# EAGLE board grid-rfduino_v3 (EAGLE 6.5.0)
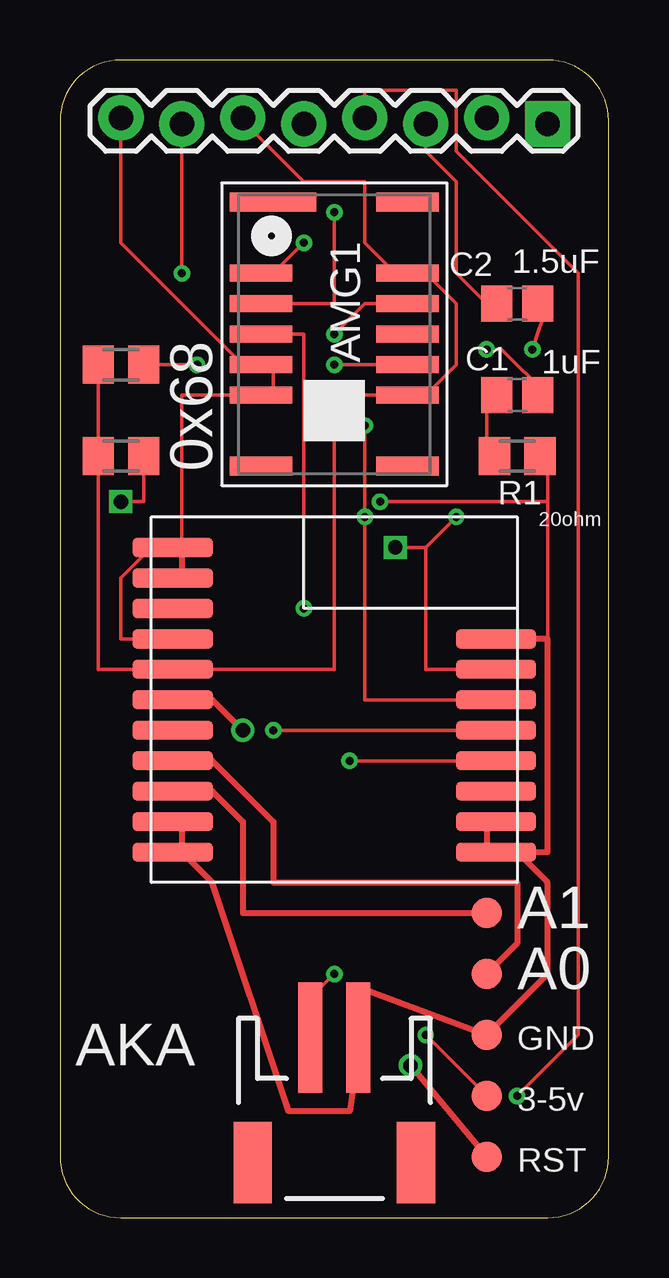
[diagram p0: board, top side]
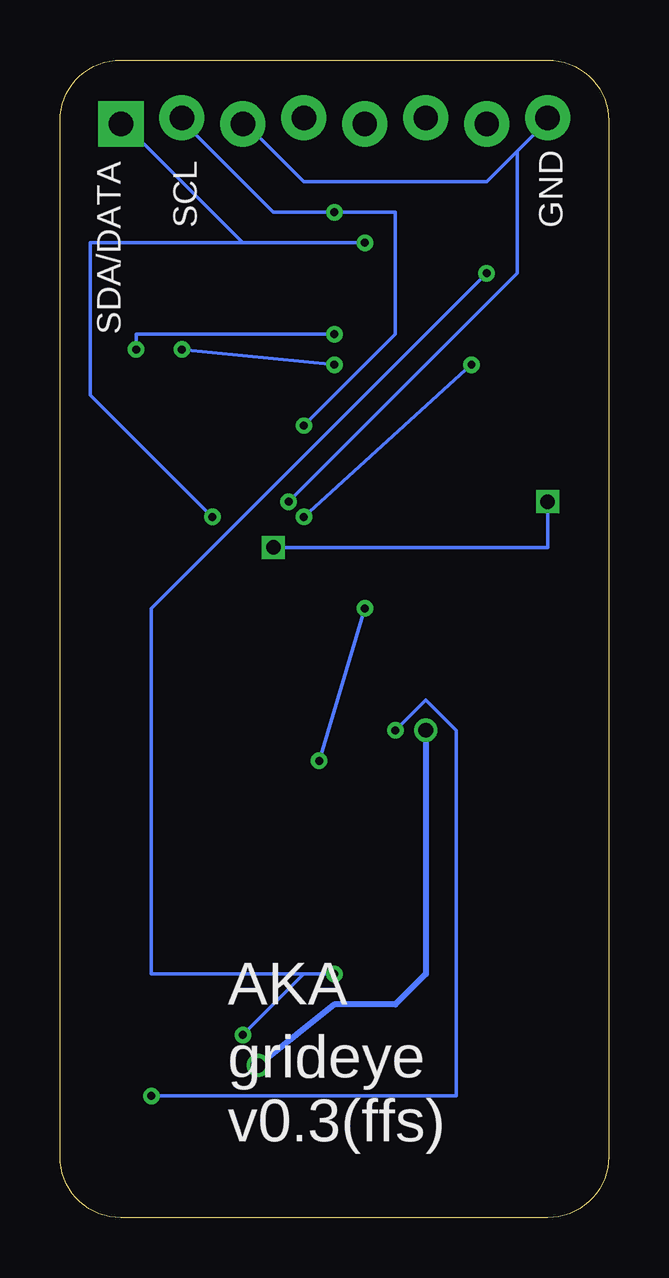
[diagram p1: board, bottom side, seen from below]

Size 22.86 x 48.26 mm. Coordinates in mm from the lower left corner, seen from the top.
Outline: 2.54,0 20.32,0 arc90 22.86,2.54 22.86,45.72 arc90 20.32,48.26 2.54,48.26 arc90 0,45.72 0,2.54 arc90 2.54,0
Copper layers (1*16): Top 0.0356mm / dielectric 1.5011mm / Bottom 0.0356mm
Design rules "LaenPCBOrder": minimum track width 6mil, minimum drill 13mil, track to track 6mil, track to pad 6mil, pad to pad 6mil, via to via 6mil, smd to smd 6mil, copper to edge 15mil, drill to drill 6mil, minimum pad ring 7mil, minimum via ring 7mil, stop-mask expansion 3mil, vias tented up to drill 0mil, thermal gap 10mil

## Footprints (pad centres in the part's own frame; a part is rotated, then mirrored left to right if it is on the bottom)
AMG8831 = smd 0.8 x 3.6: 1 -5.5,-2.55 | smd 0.7 x 2.6: 2 -2.54,-3.05; 3 -1.27,-3.05; 4 0,-3.05; 5 1.27,-3.05; 6 2.54,-3.05; 9 2.54,3.05; 10 1.27,3.05; 11 0,3.05; 12 -1.27,3.05; 13 -2.54,3.05 | smd 0.8 x 2.6: 7 5.5,-3.05; 8 5.5,3.05; 14 -5.5,3.05
C0805 = smd 1.3 x 1.5: 1 -0.85,0; 2 0.85,0
JST-2-SMD = smd 1 x 4.6: 1 -1,-3.7; 2 1,-3.7 | smd 1.6 x 3.4: NC1 -3.4,1.5; NC2 3.4,1.5
M0805 = smd 1.3 x 1.6: 1 -0.95,0; 2 0.95,0
1X08_LOCK = drill 1.016 pad 1.88 square: 1 0,0.127 | drill 1.016 pad 1.88: 2 2.54,-0.127; 3 5.08,0.127; 4 7.62,-0.127; 5 10.16,0.127; 6 12.7,-0.127; 7 15.24,0.127; 8 17.78,-0.127
PAD.03X.05 = smd 1.27 x 1.27: P$1 0,0
RFD21733 = smd 3.353 x 0.813: P$1 -6.731,6.35; P$2 -6.731,5.08; P$3 -6.731,3.81; P$4 -6.731,2.54; P$5 -6.731,1.27; P$6 -6.731,0; P$7 -6.731,-1.27; P$8 -6.731,-2.54; P$9 6.731,-6.35; P$10 6.731,-5.08; P$11 6.731,-3.81; P$12 6.731,-2.54; P$13 6.731,-1.27; P$14 6.731,0; P$15 6.731,1.27; P$16 6.731,2.54; P$17 6.731,3.81; P$18 6.731,5.08; P$19 6.731,6.35

## Placement (x,y rotation side)
AMG1  [AMG8831]  11.43,36.83 270 top
C1  1uF  [C0805]  19.05,34.29 180 top
C2  1.5uF  [C0805]  19.05,38.1 180 top
JP1  M02-JST-2MM-SMT  [JST-2-SMD]  11.43,3.81 180 top
R1  20ohm  [M0805]  19.05,31.75 180 top
R2  10k  [M0805]  2.54,35.56 0 top
R3  10k  [M0805]  2.54,31.75 0 top
TO_OLED  [1X08_LOCK]  20.32,45.72 180 top
TP1  TEST-POINT3X5  [PAD.03X.05]  17.78,10.16 0 top
TP2  TEST-POINT3X5  [PAD.03X.05]  17.78,12.7 0 top
TP3  TEST-POINT3X5  [PAD.03X.05]  17.78,5.08 0 top
TP4  TEST-POINT3X5  [PAD.03X.05]  17.78,7.62 0 top
TP5  TEST-POINT3X5  [PAD.03X.05]  17.78,2.54 0 top
U$1  RFD22301  [RFD21733]  11.43,21.59 180 top

## Library data of the parts
AMG1 = AKA_test
C1 C2 R1-R3 = adafruit
JP1 = SparkFun-Connectors; PROD_ID: CONN-08352
TO_OLED = SparkFun-Connectors
TP1-TP5 = SparkFun-Passives
U$1 = RFD22301-11.25.13

## Nets
3V3: AMG1.9 AMG1.13 R2.1 R3.1 TO_OLED.6 U$1.P$13
A0: TP1.P$1 U$1.P$16
A1: TP2.P$1 U$1.P$17
AVDD-PC: AMG1.10 C1.1
DVDD-PC: AMG1.12 C2.1
GND: AMG1.5 AMG1.6 C2.2 JP1.1 R1.1 TO_OLED.3 TO_OLED.8 TP4.P$1 U$1.P$1 U$1.P$2 U$1.P$8 U$1.P$9 U$1.P$10 U$1.P$12 U$1.P$18 U$1.P$19
INT: AMG1.4 U$1.P$4
N$1: C1.2 R1.2
OLED-RESET: TO_OLED.4 U$1.P$5
RFD-RESET: TP5.P$1 U$1.P$14
SCL: AMG1.3 R2.2 TO_OLED.2 U$1.P$6
SDA: AMG1.2 R3.2 TO_OLED.1 U$1.P$7
VIN: JP1.2 TO_OLED.7 TP3.P$1

## Tracks (layer width: path | path; a pad name or v marks a point on that pad's centre or on a via)
3V3
  Top 0.152: TO_OLED.6 7.62,45.72 10.16,43.18 12.7,43.18 12.7,40.64 13.97,39.37 AMG1.13 15.24,39.37 16.51,38.1 16.51,35.56 15.24,34.29 AMG1.9 12.7,34.29 11.43,33.02 11.43,22.86 U$1.P$13 1.59,22.86 R3.1 R2.1
A0
  Top 0.254: TP1.P$1 19.05,11.43 19.05,13.97 8.89,13.97 8.89,16.51 6.35,19.05 U$1.P$16
A1
  Top 0.254: TP2.P$1 7.62,12.7 7.62,16.51 6.35,17.78 U$1.P$17
AVDD-PC  (via drill 0.33)
  Top 0.152: v17.78,36.2 18.41,36.2 20.32,34.29 C1.1 | AMG1.10 v11.43,35.56
  Bottom 0.152: v11.43,35.56 v17.78,36.2
DVDD-PC  (via drill 0.33)
  Top 0.152: v19.68,36.2 20.32,38.1 C2.1 | v11.43,36.83 12.7,38.1 AMG1.12
  Bottom 0.152: v11.43,36.83 19.68,36.83 v19.68,36.2
GND  (via drill 0.33)
  Top 0.152: C2.2 17.78,38.1 16.51,39.37 16.51,43.18 15.24,44.45 TO_OLED.3 15.24,45.72 | 5.08,27.94 5.08,34.29 AMG1.6 8.89,34.29 8.89,35.56 AMG1.5 7.62,35.56 2.54,40.64 TO_OLED.8 | U$1.P$12 2.54,24.13 2.54,26.67 3.81,27.94 U$1.P$9 | 20.32,24.13 20.32,29.84 | 20.32,29.84 20.32,31.75 R1.1 | v13.34,29.84 20.32,29.84
  Top 0.254: U$1.P$2 17.78,16.51 17.78,15.24 U$1.P$1 19.05,15.24 | U$1.P$10 5.08,26.67 5.08,27.94 U$1.P$9 | 5.08,15.24 5.08,16.51 U$1.P$18 | U$1.P$8 20.32,24.13 20.32,15.24 19.05,15.24 | 12.7,8.89 JP1.1 | 19.05,15.24 20.32,13.97 20.32,10.16 TP4.P$1 12.7,9.53 12.7,8.89 | 5.08,15.24 6.35,13.97 9.53,4.45 12.06,4.45 12.7,8.89 | 5.08,15.24 U$1.P$19
  Bottom 0.152: 3.81,44.45 2.54,45.72 TO_OLED.8 | 3.81,44.45 5.08,43.18 12.7,43.18 15.24,45.72 TO_OLED.3 | v13.34,29.84 3.81,39.37 3.81,44.45
INT  (via drill 0.33)
  Top 0.152: AMG1.4 10.16,36.83 v10.16,25.4 | U$1.P$4 v12.06,19.05
  Bottom 0.152: v12.06,19.05 v10.16,25.4
N$1
  Top 0.152: C1.2 17.78,34.29 17.78,31.75 R1.2
OLED-RESET  (via drill 0.33)
  Top 0.152: v8.89,20.32 U$1.P$5 | v19.05,5.08 21.59,7.62 21.59,39.37 16.51,44.45 16.51,46.99 12.7,46.99 TO_OLED.4 12.7,45.72
  Bottom 0.152: v8.89,20.32 7.62,21.59 6.35,20.32 6.35,5.08 v19.05,5.08
RFD-RESET  (via drill 0.61)
  Top 0.254: v14.61,6.35 TP5.P$1 | v7.62,20.32 6.35,21.59 U$1.P$14
  Bottom 0.254: v14.61,6.35 11.43,8.89 8.89,8.89 7.62,10.16 v7.62,20.32
SCL  (via drill 0.33)
  Top 0.152: AMG1.3 11.43,38.1 v11.43,41.91 | U$1.P$6 12.7,21.59 v12.7,29.21 v12.7,33.02 | v5.71,35.56 R2.2
  Bottom 0.152: TO_OLED.2 17.78,45.72 13.97,41.91 v11.43,41.91 8.89,41.91 8.89,36.83 v12.7,33.02 | v12.7,29.21 v5.71,35.56
SDA  (via drill 0.33, 0.6)
  Top 0.152: v10.16,40.64 8.89,39.37 AMG1.2 | U$1.P$7 15.24,22.86 15.24,27.94 | v16.51,29.21 15.24,27.94 | 15.24,27.94 v13.97,27.94 | v2.54,29.84 3.49,29.84 R3.2
  Bottom 0.152: 15.24,40.64 v10.16,40.64 | 15.24,40.64 20.32,45.72 TO_OLED.1 | v16.51,29.21 21.59,34.29 21.59,40.64 15.24,40.64 | v13.97,27.94 2.54,27.94 v2.54,29.84
VIN  (via drill 0.33)
  Top 0.152: v15.24,7.62 TP3.P$1 | v11.43,10.16 10.16,8.89 10.16,7.62 JP1.2 | v5.08,39.37 TO_OLED.7 5.08,45.72
  Bottom 0.152: 12.7,10.16 v15.24,7.62 | v11.43,10.16 12.7,10.16 | v5.08,39.37 19.05,25.4 19.05,10.16 12.7,10.16

## Text on the board
tNames: 0x68 | A1 | A0 | GND | AKA | 3-5v | RST
bNames: GND | SCL | SDA/DATA | AKA | grideye / v0.3(ffs)